# Altium PCB ADS1115 Module PCB.PcbDoc
Units mm, origin at the board's own origin, x right, y up, seen from the top; angles counter-clockwise.
Board outline 27.18 x 17.65 mm, 2 copper layers (Top Layer, Bottom Layer); 10 components, 10 nets, 38 pads, 7 vias.
Unrouted connection lines stored in the file: 2.
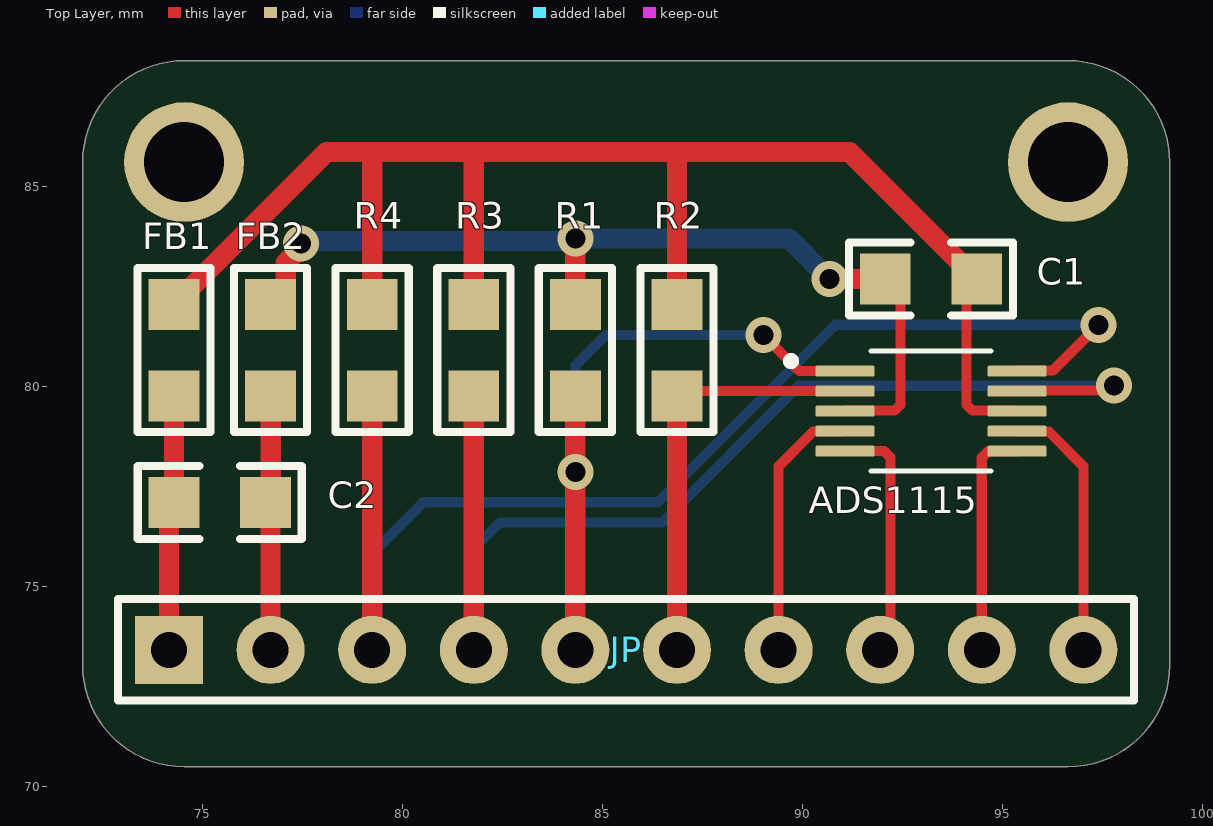
[diagram p0: Top Layer view]
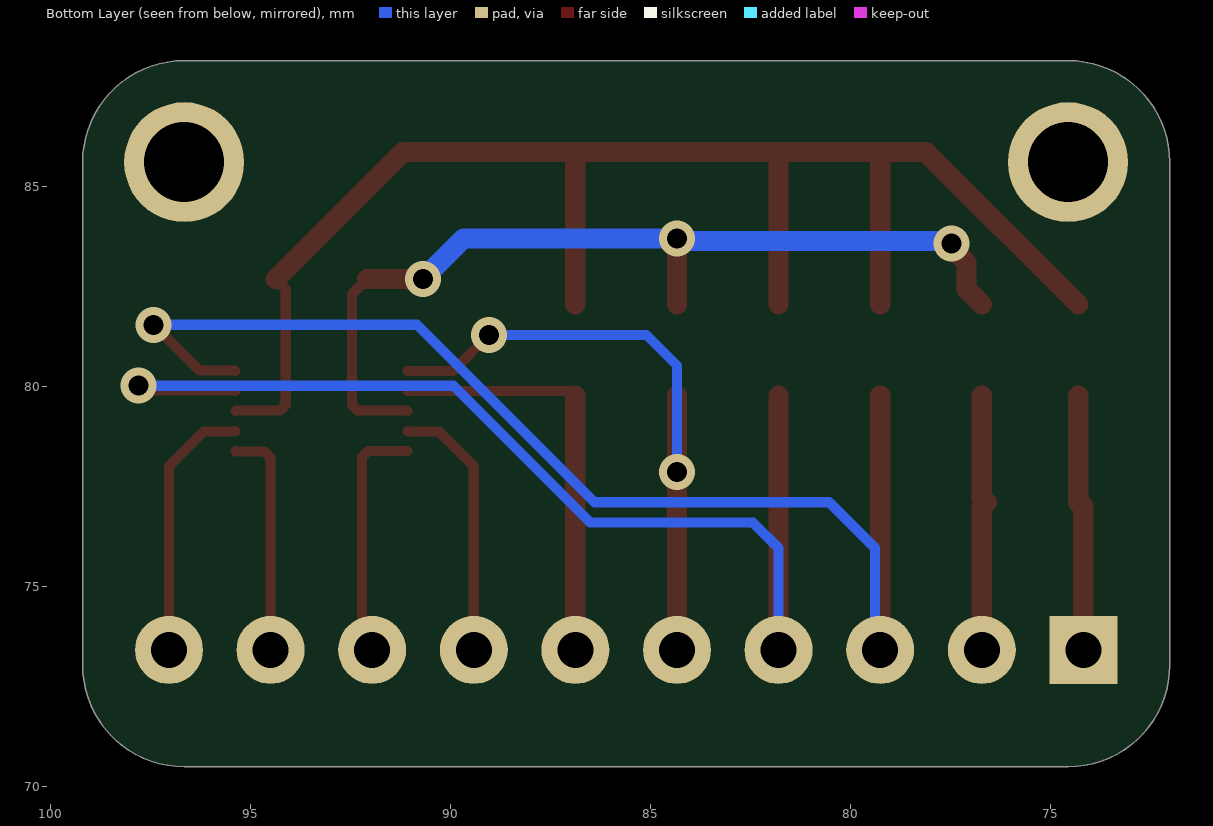
[diagram p1: Bottom Layer view, seen from below]

## Layer stack, top to bottom
Top Solder: solder mask 0.0102, Solder Resist, Dk 3.5
Top Layer: signal copper 0.0356
Dielectric 1: dielectric 0.32, FR-4, Dk 4.8
Bottom Layer: signal copper 0.0356
Bottom Solder: solder mask 0.0102, Solder Resist, Dk 3.5

## Board outline
72.009,73.025 72.009,85.598 cw(c74.549,85.598) 74.549,88.138 96.647,88.138 cw(c96.647,85.598) 99.187,85.598 99.187,73.025 cw(c96.647,73.025) 96.647,70.485 74.549,70.485 cw(c74.549,73.025)

## Design rules (kind name [scope] priority, off if disabled: settings)
Clearance [All] p1: gap=0.178 ignorepadtopadclearanceinfootprint=TRUE
PolygonConnect [All] p1: connectstyle=Relief reliefconductorwidth=0.254 reliefentries=4 polygonreliefangle="90 Angle" airgapwidth=0.254
RoutingVias [All] p1: holewidth=0.711 width=1.27 viastyle="Through Hole" minholewidth=0.711 minwidth=1.27 maxholewidth=0.711 maxwidth=1.27
SolderMaskExpansion [All] p1: expansion=0.102 istentingtop=FALSE
Width [All] p1: maxlimit=1 minlimit=0.254 preferedwidth=0.508
30 further rules are at their usual default settings.

## Components (designator, comment, footprint, x,y, rotation, side; value= is the part's Value field where it differs from the comment)
ADS1115 "ADS1115IDGSR" SOP50P490X110-10N 93.218,79.375 r0 top (schematic designator U)
C1 "1uF" "C 0805" 93.218,82.677 r0 top
C2 "1uF" "C 0805" 75.438,77.089 r180 top
FB1 "=Value" "F 0805" 74.295,80.899 r270 top
FB2 "=Value" "F 0805" 76.708,80.899 r90 top
JP "HDR-1X10" HDR-1X10 74.168,73.406 r0 top
R1 "10K" "R 0805" 84.328,80.899 r270 top
R2 "10K" "R 0805" 86.868,80.899 r90 top
R3 "10K" "R 0805" 81.788,80.899 r90 top
R4 "10K" "R 0805" 79.248,80.899 r90 top

## Footprints (in the part's own frame and the unit in brackets; to place one, negate y for a bottom-side part, rotate by r counter-clockwise, add the part's x,y. Pads: shape width x height; smd on the part's side, far side on the other; paste and mask are expansions set on the pad)
"C 0805" [mil] "ï¿½Þ¼ï¿½ï¿½ï¿½ï¿½ï¿½Æ¬ï¿½ï¿½ï¿½ï¿½"
  rect 50x50 smd: 1(-45,0) 2(45,0)
  silkscreen extent -81,-36 81,36, body extent -39,-24 39,24, height 20
"F 0805" [mm]
  rect 1.27x1.27 smd: 1(-1.143,0) 2(1.143,0)
  silkscreen extent -2.05,-0.91 2.05,0.91, body extent -1,-0.62 1,0.63, height 0.5
HDR-1X10 [mm] "ÅÅÕë£¬10½Å"
  rect 1.7x1.7 hole 0.9: 1(0,0)
  round 1.7 hole 0.9: 2(2.54,0) 3(5.08,0) 4(7.62,0) 5(10.16,0) 6(12.7,0) 7(15.24,0) 8(17.78,0) 9(20.32,0) 10(22.86,0)
  silkscreen extent -1.27,-1.27 24.13,1.27, body extent -1.27,-1.27 24.13,1.27, height 8.5
"R 0805" [mm] "1/8Wï¿½ï¿½Æ¬ï¿½ï¿½ï¿½ï¿½"
  rect 1.27x1.27 smd: 1(-1.143,0) 2(1.143,0)
  silkscreen extent -2.05,-0.91 2.05,0.91, body extent -1,-0.62 1,0.63, height 0.5
SOP50P490X110-10N [mm]
  rrect25% 1.47x0.28 smd: 1(-2.15,1) 2(-2.15,0.5) 3(-2.15,0) 4(-2.15,-0.5) 5(-2.15,-1) 6(2.15,-1) 7(2.15,-0.5) 8(2.15,0) 9(2.15,0.5) 10(2.15,1)
  silkscreen extent -3.6,-1.5 1.5,1.5, body extent -2.45,-1.5 2.45,1.5, height 1.1

## Part data
ADS1115: "16-Bit 860SPS 4-Ch Delta-Sigma ADC With PGA, Oscillator, Vref, Comparator, and I2C 10-VSSOP -40 to 125", Package="VSSOP-10 Texas Instruments", Availability=Good, BuyPart=https://www.snapeda.com/parts/ADS1115IDGSR/Texas%20Instruments/view-part/45903/?ref=eda, DigiKey-Purchase-URL=https://snapeda.com/shop?store=DigiKey&id=45903, MF="Texas Instruments", Mouser-Purchase-URL=https://snapeda.com/shop?store=Mouser&id=45903, MP=ADS1115IDGSR, Price=None, SnapEDA_Link=https://www.snapeda.com/parts/ADS1115IDGSR/Texas%20Instruments/view-part/45903/?ref=snap, Texas_Instruments-Purchase-URL=https://snapeda.com/shop?store=Texas+Instruments&id=45903
C1 C2: library part C, "Non-polar patch capacitor", BOM名称=无极性贴片电容, 学习资源=www.ooocke.com, 版权归属=源创客
FB1 FB2: library part FB, "Ferrite Bead", BOM名称=贴片电阻, 学习资源=www.ooocke.com, 版权归属=源创客
JP: library part "Header 10", "10P Connector", BOM名称=10P接插件, 学习资源=www.ooocke.com, 版权归属=源创客
R1 R2 R3 R4: library part R, "Chip resistor", BOM名称="Chip resistor", 学习资源=www.ooocke.com, 版权归属=源创客

## Free pads (board coordinates)
  round 3 hole 2: 2(96.647,85.598) 3(74.549,85.598)

## Via types
v1: diameter 0.9, hole 0.5, Top Layer to Bottom Layer, 7 vias

## Nets (pads, with @x,y where several pads share a name; then routed paths per layer and width w, separated by ;. In a path a pad name is that pad's centre, name@x,y a point inside that pad or via, vN(x,y) a via of type N, cw(c..) or ccw(c..) an arc to the next point about the centre after c; other vN are vias at no path point)
ADDR: ADS1115.1 JP.5 R1.2 | length 16.4
  Top Layer w0.254: v1(89.027,81.28) 89.932,80.375 ADS1115.1
  Top Layer w0.508: JP.5 v1(84.328,77.851) R1.2
  Bottom Layer w0.254: v1(84.328,77.851) 84.328,80.518 85.09,81.28 v1(89.027,81.28)
AIN0: ADS1115.4 JP.7 | length 6.6
  Top Layer w0.254: JP.7 89.408,78.001 90.269,78.862 91.055,78.862 ADS1115.4
AIN1: ADS1115.5 JP.8 | length 6.1
  Top Layer w0.254: ADS1115.5 92.053,78.375 92.202,78.226 92.202,73.66 JP.8
AIN2: ADS1115.6 JP.9 | length 5.8
  Top Layer w0.254: JP.9 94.488,78.213 94.637,78.362 95.355,78.362 ADS1115.6
AIN3: ADS1115.7 JP.10 | length 6.6
  Top Layer w0.254: ADS1115.7 95.381,78.862 96.167,78.862 97.028,78.001 JP.10
ALERT: ADS1115.2 JP.6 R2.1 | length 10.6
  Top Layer w0.254: R2.1 cw(c86.987,79.756) 86.987,79.875 ADS1115.2
  Top Layer w0.508: JP.6 R2.1
GND: ADS1115.3 C1.1 C2.1 FB2.1 FB2.2 JP.2 R1.1 | length 29.8
  Top Layer w0.254: ADS1115.3 91.081,79.388 92.307,79.388 92.456,79.537 92.456,82.296 C1.1
  Top Layer w0.508: JP.2 76.708,76.962 ccw(c76.581,76.962) C2.1 ccw(c76.581,77.216) 76.708,77.216 FB2.1 ; FB2.2 77.089,82.423 77.089,83.079 77.47,83.46 v1(77.47,83.566) ; R1.1 v1(84.328,83.693) ; v1(90.678,82.677) C1.1
  Bottom Layer w0.508: v1(77.47,83.566) 77.534,83.629 84.264,83.629 v1(84.328,83.693) 89.662,83.693 v1(90.678,82.677)
SCL: ADS1115.10 JP.3 R4.1 | length 31.8
  Top Layer w0.254: ADS1115.10 95.381,80.388 96.263,80.388 v1(97.409,81.534)
  Top Layer w0.508: JP.3 R4.1
  Bottom Layer w0.254: JP.3 79.375,73.533 79.375,75.946 80.525,77.096 86.392,77.096 90.829,81.534 v1(97.409,81.534)
SDA: ADS1115.9 JP.4 R3.1 | length 29.1
  Top Layer w0.254: ADS1115.9 95.381,79.888 97.668,79.888 v1(97.79,80.01)
  Top Layer w0.508: JP.4 R3.1
  Bottom Layer w0.254: JP.4 81.788,75.946 82.435,76.593 86.499,76.593 89.916,80.01 v1(97.79,80.01)
VDD: ADS1115.8 C1.2 C2.2 FB1.1 FB1.2 JP.1 R2.2 R3.2 R4.2 | length 45.8
  Top Layer w0.254: C1.2 94.107,82.423 94.107,79.537 94.256,79.388 95.355,79.388 ADS1115.8
  Top Layer w0.508: FB1.2 C2.2 ccw(c74.295,76.962) 74.168,76.962 JP.1 ccw(c74.168,73.66) JP.1@74.422,73.66 ; FB1.1 78.105,85.852 79.248,85.852 ; R4.2 79.248,85.852 ; R3.2 81.788,85.852 ; R2.2 86.868,85.852 ; C1.2 91.186,85.852 86.868,85.852 ; 79.248,85.852 81.788,85.852 ; 81.788,85.852 86.868,85.852

## Silkscreen, mask and mechanical layers (free items; w line width, h text height)
Mechanical 1:
  lines w0.254: 77.597,88.138 96.647,88.138 cw(c96.647,85.598) 99.187,85.598 99.187,73.66 99.187,73.025 cw(c96.647,73.025) 96.647,70.485 95.25,70.485 74.549,70.485 cw(c74.549,73.025) 72.009,73.025 72.009,85.09 72.009,85.598 cw(c74.549,85.598) 74.549,88.138 77.724,88.138